# Altium PCB Audio_testboard.PcbDoc (part 2 of 6)
Units mm, origin at the board's own origin, x right, y up, seen from the top; angles counter-clockwise.
Board outline 220.73 x 144.32 mm, 4 copper layers (Top Layer, Mid-Layer 1, Mid-Layer 2, Bottom Layer), stack 1.894 mm thick; 462 components, 310 nets, 1757 pads, 740 vias.
Unrouted connection lines stored in the file: 5.
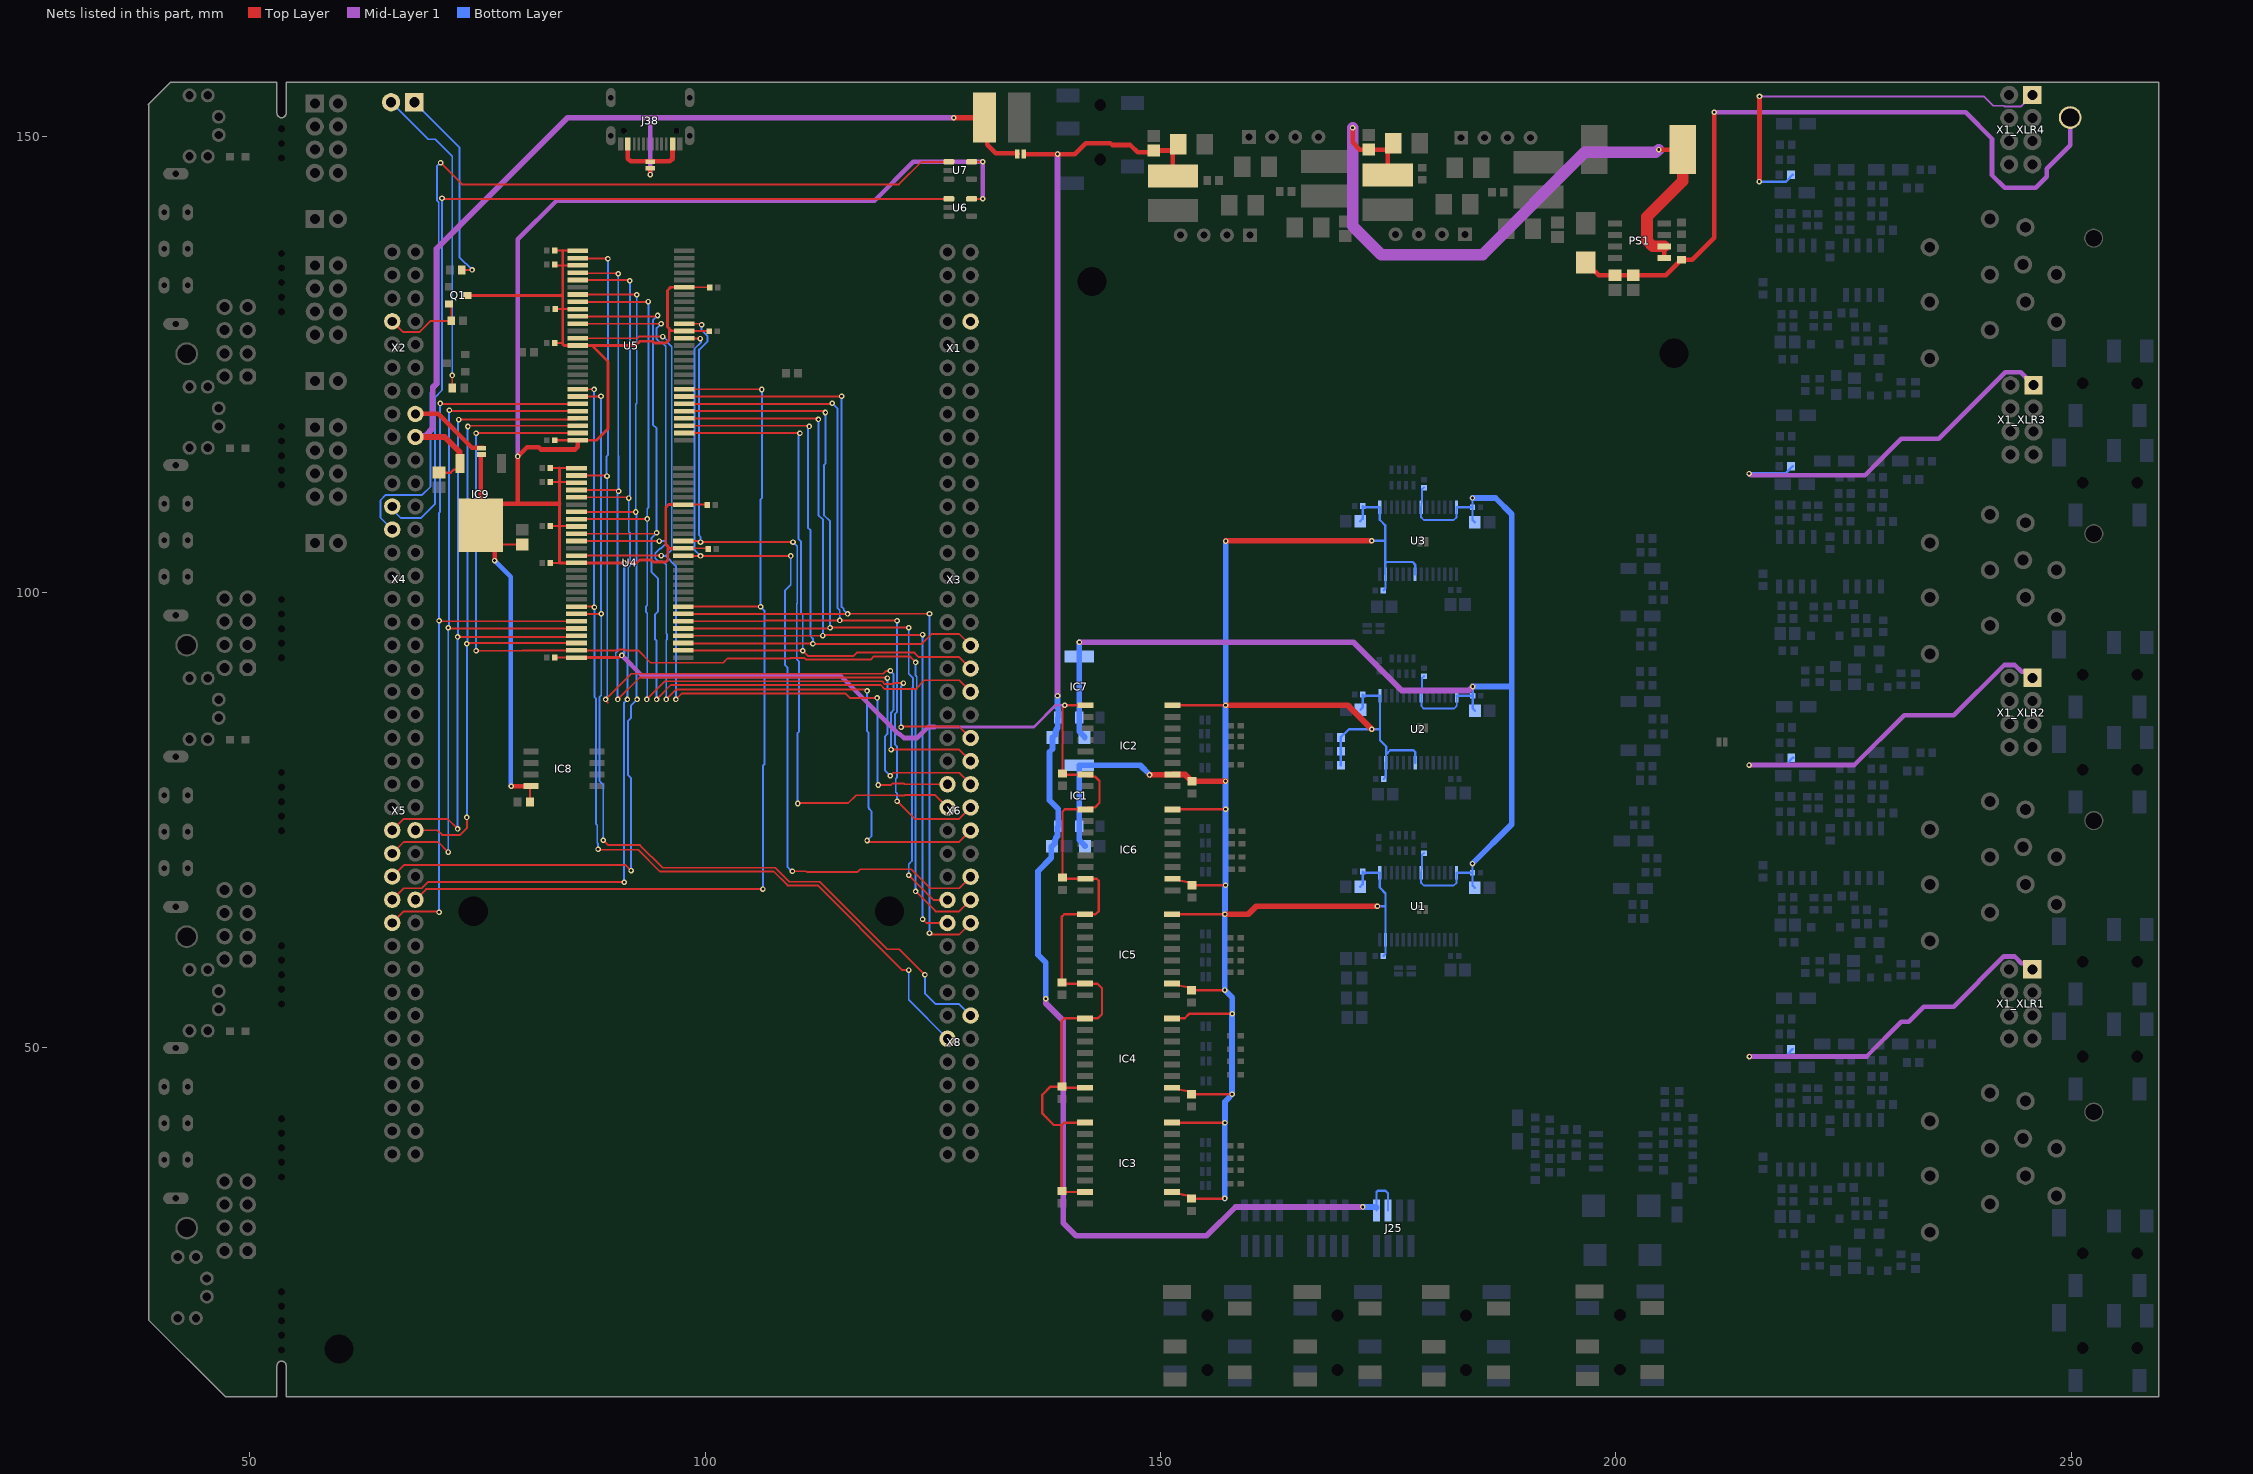
[diagram p4: the nets of this part, all layers, seen from the top]

## Footprints (in the part's own frame and the unit in brackets; to place one, negate y for a bottom-side part, rotate by r counter-clockwise, add the part's x,y. Pads: shape width x height; smd on the part's side, far side on the other; paste and mask are expansions set on the pad) (continued)
TSOP-54 [mil]
  rect 20x90 smd: 1(-409.45,-230.31) 2(-377.95,-230.31) 3(-346.46,-230.31) 4(-314.96,-230.31) 5(-283.46,-230.31) 6(-251.97,-230.31) 7(-220.47,-230.31) 8(-188.98,-230.31) 9(-157.48,-230.31) 10(-125.98,-230.31) 11(-94.49,-230.31) 12(-62.99,-230.31) 13(-31.5,-230.31) 14(0,-230.31) 15(31.5,-230.31) 16(62.99,-230.31) 17(94.49,-230.31) 18(125.98,-230.31) 19(157.48,-230.31) 20(188.98,-230.31) 21(220.47,-230.31) 22(251.97,-230.31) 23(283.46,-230.31) 24(314.96,-230.31) 25(346.46,-230.31) 26(377.95,-230.31) 27(409.45,-230.31) 28(409.45,230.32) 29(377.95,230.32) 30(346.46,230.32) 31(314.96,230.32) 32(283.46,230.32) 33(251.97,230.32) 34(220.47,230.32) 35(188.98,230.32) 36(157.48,230.32) 37(125.98,230.32) 38(94.49,230.32) 39(62.99,230.32) 40(31.5,230.32) 41(0,230.32) 42(-31.5,230.32) 43(-62.99,230.32) 44(-94.49,230.32) 45(-125.98,230.32) 46(-157.48,230.32) 47(-188.98,230.32) 48(-220.47,230.32) 49(-251.97,230.32) 50(-283.46,230.32) 51(-314.96,230.32) 52(-346.46,230.32) 53(-377.95,230.32) 54(-409.45,230.32)
  silkscreen extent -433,-197 433,197, body extent -443,-230 443,226, height 55
TSSOP-28 [mil]
  rect 58x14 smd mask+2.36: 1(-145,166) 2(-145,141) 3(-145,115) 4(-145,90) 5(-145,64) 6(-145,38) 7(-145,13) 8(-145,-13) 9(-145,-38) 10(-145,-64) 11(-145,-90) 12(-145,-115) 13(-145,-141) 14(-145,-166) 15(145,-166) 16(145,-141) 17(145,-115) 18(145,-90) 19(145,-64) 20(145,-38) 21(145,-13) 22(145,13) 23(145,38) 24(145,64) 25(145,90) 26(145,115) 27(145,141) 28(145,166)
  silkscreen extent -89,-193 89,193, body extent -127,-177 127,177, height 44
"YAGEO RES 0603_1608" [mm] "Chip Resistor, 2-Leads, Body 1.60x0.80mm"
  rect 0.9x0.8 smd: 1(-0.85,0) 2(0.85,0)
  silkscreen extent -1.5,-0.6 1.5,0.6, body extent -0.8,-0.4 0.8,0.4, height 0.45

## Part data
C1 C4 C6 C7 C9 C25 C28 C30 C41 C42 C51: library part LMK212ABJ106KD-T, "CAP CER 10UF 10V X5R 0805", Device Package="0805 (2012 Metric)", Manufacturer="Taiyo Yuden", Operating Temperature="-55°C ~ 85°C", Supplier Part Number 1=587-4282-1-ND, Temperature Coefficient=X5R, Tolerance=±10%, Voltage - Rated=10V, Applications="SMPS Filtering", Capacitance="10 µF", ComponentLink1Description=Datasheet, ComponentLink1URL=https://www.yuden.co.jp/productdata/catalog/mlcc01_e.pdf, ComponentLink2Description="DigiKey Link", ComponentLink2URL=https://www.digikey.com/en/products/detail/taiyo-yuden/LMK212ABJ106KD-T/4970805, LastUpdated="4/6/2026 7:33:15 PM", Lifecycle Status=Active, Minimum Order=1, Mounting Type="Surface Mount, MLCC", Package / Case="0805 (2012 Metric)", Packaging=TapeAndReel, Part Number=LMK212ABJ106KD-T, Part Status=Active, PartId=3697, Price=0.02, Series=M, Size / Dimension="0.079\" L x 0.049\" W (2.00mm x 1.25mm)", Supplier 1=DigiKey, Thickness (Max)="0.037\" (0.95mm)"
C1_XLR1 C1_XLR2 C1_XLR3 C1_XLR4 C7_XLR1 C7_XLR2 C7_XLR3 C7_XLR4 C12_XLR1 C12_XLR2 C12_XLR3 C12_XLR4 C14_XLR1 C14_XLR2 C14_XLR3 C14_XLR4 C82 C86: library part T491A106K010AT, "CAP TANT 10UF 10% 10V 1206", Device Package="1206 (3216 Metric)", ESR (Equivalent Series Resistance)=3.8Ohm, Lifetime @ Temp.="2000 Hrs @ 125°C", Manufacturer=KEMET, Manufacturer Size Code=A, Operating Temperature="-55°C ~ 125°C", Supplier Part Number 1=399-3684-1-ND, Tolerance=±10%, Voltage - Rated="10 V", Capacitance="10 µF", ComponentLink1Description=Datasheet, ComponentLink1URL=https://api.kemet.com/component-edge/download/datasheet/T491A106K010AT.pdf, ComponentLink2Description="DigiKey Link", ComponentLink2URL=https://www.digikey.com/en/products/detail/kemet/T491A106K010AT/818545, Features="General Purpose", Height - Seated (Max)="0.071\" (1.80mm)", LastUpdated="4/5/2026 8:12:52 PM", Lifecycle Status=Active, Minimum Order=1, Mounting Type="Surface Mount", Package / Case="1206 (3216 Metric)", Packaging=TapeAndReel, Part Number=T491A106K010AT, Part Status=Active, PartId=330, Price=0.09, Series=T491, Size / Dimension="0.126\" L x 0.063\" W (3.20mm x 1.60mm)", Supplier 1=DigiKey, Type=Molded
C2 C23: library part EMK212B7105KGHTR, "CAP CER 1UF 16V X7R 0805", Device Package="0805 (2012 Metric)", Manufacturer="Taiyo Yuden", Operating Temperature="-55°C ~ 125°C", Ratings=AEC-Q200, Supplier Part Number 1=587-6310-1-ND, Temperature Coefficient=X7R, Tolerance=±10%, Voltage - Rated=16V, Applications=Automotive, Capacitance="1 µF", ComponentLink1Description=Datasheet, ComponentLink1URL="https://ds.yuden.co.jp/TYCOMPAS/ut/detail?pn=EMK212B7105KGHTR &u=M", ComponentLink2Description="DigiKey Link", ComponentLink2URL=https://www.digikey.com/en/products/detail/taiyo-yuden/EMK212B7105KGHTR/6563155, LastUpdated="4/6/2026 7:33:15 PM", Lifecycle Status=Active, Minimum Order=1, Mounting Type="Surface Mount, MLCC", Package / Case="0805 (2012 Metric)", Packaging=TapeAndReel, Part Number=EMK212B7105KGHTR, Part Status=Active, PartId=3641, Price=0.02, Series=M, Size / Dimension="0.079\" L x 0.049\" W (2.00mm x 1.25mm)", Supplier 1=DigiKey, Thickness (Max)="0.053\" (1.35mm)"
C2_XLR1 C2_XLR2 C2_XLR3 C2_XLR4 C84 C88: library part GRM1885C1H103JA01D, "CAP CER 10000PF 50V C0G/NP0 0603", Device Package="0603 (1608 Metric)", Manufacturer="Murata Electronics", Operating Temperature="-55°C ~ 125°C", Supplier Part Number 1=490-9666-1-ND, Temperature Coefficient="C0G, NP0", Tolerance=±5%, Voltage - Rated=50V, Applications="General Purpose", Capacitance="10000 pF", ComponentLink1Description=Datasheet, ComponentLink1URL=https://www.murata.com/~/media/webrenewal/support/library/catalog/products/capacitor/mlcc/c02e.ashx?la=en-us, ComponentLink2Description="DigiKey Link", ComponentLink2URL=https://www.digikey.com/en/products/detail/murata-electronics/GRM1885C1H103JA01D/4421555, LastUpdated="4/6/2026 7:23:21 PM", Lifecycle Status=Active, Minimum Order=1, Mounting Type="Surface Mount, MLCC", Package / Case="0603 (1608 Metric)", Packaging=TapeAndReel, Part Number=GRM1885C1H103JA01D, Part Status=Active, PartId=11077, Price=0.02, Series=GRM, Size / Dimension="0.063\" L x 0.031\" W (1.60mm x 0.80mm)", Supplier 1=DigiKey, Thickness (Max)="0.035\" (0.90mm)"
C3 C5 C8 C10 C11 C12 C15 C16 C27 C29 C40 C43 C44 C46 C50: library part CL05B104JO5NNNC, "CAP CER 0.1UF 16V X7R 0402", Device Package="0402 (1005 Metric)", Manufacturer="Samsung Electro-Mechanics", Operating Temperature="-55°C ~ 125°C", Supplier Part Number 1=1276-1505-1-ND, Temperature Coefficient=X7R, Tolerance=±5%, Voltage - Rated=16V, Applications="General Purpose", Capacitance="0.1 µF", ComponentLink1Description=Datasheet, ComponentLink1URL=http://www.samsungsem.com/kr/support/product-search/mlcc/CL05B104JO5NNNC.jsp, ComponentLink2Description="DigiKey Link", ComponentLink2URL=https://www.digikey.com/en/products/detail/samsung-electro-mechanics/CL05B104JO5NNNC/3887163, LastUpdated="4/6/2026 7:11:05 PM", Lifecycle Status=Active, Minimum Order=1, Mounting Type="Surface Mount, MLCC", Package / Case="0402 (1005 Metric)", Packaging=TapeAndReel, Part Number=CL05B104JO5NNNC, Part Status=Active, PartId=2761, Price=0.01, Series=CL, Size / Dimension="0.039\" L x 0.020\" W (1.00mm x 0.50mm)", Supplier 1=DigiKey, Thickness (Max)="0.022\" (0.55mm)"
C3_XLR1 C3_XLR2 C3_XLR3 C3_XLR4 C4_XLR1 C4_XLR2 C4_XLR3 C4_XLR4 C5_XLR1 C5_XLR2 C5_XLR3 C5_XLR4 C6_XLR1 C6_XLR2 C6_XLR3 C6_XLR4 C81 C85: library part CC0603GRNPO9BN220, "CAP CER 22PF 50V C0G/NPO 0603", Device Package="0603 (1608 Metric)", Manufacturer=Yageo, Operating Temperature="-55°C ~ 125°C", Supplier Part Number 1=311-3925-1-ND, Temperature Coefficient="C0G, NP0", Tolerance=±2%, Voltage - Rated=50V, Applications="General Purpose", Capacitance="22 pF", ComponentLink1Description=Datasheet, ComponentLink1URL=https://www.yageo.com/upload/media/product/productsearch/datasheet/mlcc/UPY-GP_NP0_16V-to-50V_17.pdf, ComponentLink2Description="DigiKey Link", ComponentLink2URL=https://www.digikey.com/en/products/detail/yageo/CC0603GRNPO9BN220/5883550, LastUpdated="4/6/2026 7:23:47 PM", Lifecycle Status=Active, Minimum Order=1, Mounting Type="Surface Mount, MLCC", Package / Case="0603 (1608 Metric)", Packaging=TapeAndReel, Part Number=CC0603GRNPO9BN220, Part Status=Active, PartId=3677, Price=0.01, Series=CC, Size / Dimension="0.063\" L x 0.031\" W (1.60mm x 0.80mm)", Supplier 1=DigiKey, Thickness (Max)="0.035\" (0.90mm)"
C8_XLR1 C8_XLR2 C8_XLR3 C8_XLR4 C9_XLR1 C9_XLR2 C9_XLR3 C9_XLR4 C10_XLR1 C10_XLR2 C10_XLR3 C10_XLR4 C11_XLR1 C11_XLR2 C11_XLR3 C11_XLR4 C69 C89 C90: library part C0603C104K5RAC7411, "CAP CER 0.1UF 50V X7R 0603", Device Package="0603 (1608 Metric)", Manufacturer=KEMET, Operating Temperature="-55°C ~ 125°C", Supplier Part Number 1=399-C0603C104K5RAC7411CT-ND, Temperature Coefficient=X7R, Tolerance=±10%, Voltage - Rated=50V, Applications="Bypass, Decoupling", Capacitance="0.1 µF", ComponentLink1Description=Datasheet, ComponentLink1URL=https://api.kemet.com/component-edge/download/datasheet/C0603C104K5RAC7411.pdf, ComponentLink2Description="DigiKey Link", ComponentLink2URL=https://www.digikey.com/en/products/detail/kemet/C0603C104K5RAC7411/3317013, LastUpdated="4/6/2026 7:23:52 PM", Lifecycle Status=Active, Minimum Order=1, Mounting Type="Surface Mount, MLCC", Package / Case="0603 (1608 Metric)", Packaging=TapeAndReel, Part Number=C0603C104K5RAC7411, Part Status=Active, PartId=2233, Price=0.01, Series="SMD Comm X7R", Size / Dimension="0.063\" L x 0.031\" W (1.60mm x 0.80mm)", Supplier 1=DigiKey, Thickness (Max)="0.035\" (0.90mm)"
C13 C14 C19 C20 C45 C48: library part TR3A106K010C2000, "CAP TANT 10UF 10% 10V 1206", Device Package="1206 (3216 Metric)", ESR (Equivalent Series Resistance)=2Ohm, Manufacturer="Vishay Sprague", Manufacturer Size Code=A, Operating Temperature="-55°C ~ 125°C", Supplier Part Number 1=718-1300-1-ND, Tolerance=±10%, Voltage - Rated="10 V", Capacitance="10 µF", ComponentLink1Description=Datasheet, ComponentLink1URL=http://www.vishay.com/docs/40080/tr3.pdf, ComponentLink2Description="DigiKey Link", ComponentLink2URL=https://www.digikey.com/en/products/detail/vishay-sprague/TR3A106K010C2000/1579435, Features="General Purpose", Height - Seated (Max)="0.071\" (1.80mm)", LastUpdated="4/5/2026 8:12:52 PM", Lifecycle Status=Active, Minimum Order=1, Mounting Type="Surface Mount", Package / Case="1206 (3216 Metric)", Packaging=TapeAndReel, Part Number=TR3A106K010C2000, Part Status=Active, PartId=299, Price=0.24, Series="TANTAMOUNT™, TR3", Size / Dimension="0.126\" L x 0.063\" W (3.20mm x 1.60mm)", Supplier 1=DigiKey, Type=Molded
C13_XLR1 C13_XLR2 C13_XLR3 C13_XLR4 C71 C93 C96_XLR1 C96_XLR2 C96_XLR3 C96_XLR4: library part C0805C105K4RAC7800, "CAP CER 1UF 16V X7R 0805", Device Package="0805 (2012 Metric)", Manufacturer=KEMET, Operating Temperature="-55°C ~ 125°C", Supplier Part Number 1=399-C0805C105K4RAC7800CT-ND, Temperature Coefficient=X7R, Tolerance=±10%, Voltage - Rated=16V, Applications="Bypass, Decoupling", Capacitance="1 µF", ComponentLink1Description=Datasheet, ComponentLink1URL=https://api.kemet.com/component-edge/download/datasheet/C0805C105K4RACTU.pdf, ComponentLink2Description="DigiKey Link", ComponentLink2URL=https://www.digikey.com/en/products/detail/kemet/C0805C105K4RAC7800/416047, LastUpdated="4/6/2026 7:31:58 PM", Lifecycle Status=Active, Minimum Order=1, Mounting Type="Surface Mount, MLCC", Package / Case="0805 (2012 Metric)", Packaging=TapeAndReel, Part Number=C0805C105K4RAC7800, Part Status=Active, PartId=32075, Price=0.01, Series="SMD Comm X7R", Size / Dimension="0.079\" L x 0.049\" W (2.00mm x 1.25mm)", Supplier 1=DigiKey, Thickness (Max)="0.039\" (1.00mm)"
C17 C18 C21 C22 C47 C49: library part CC0603JRX7R9BB221, "CAP CER 220PF 50V X7R 0603", Device Package="0603 (1608 Metric)", Manufacturer=Yageo, Operating Temperature="-55°C ~ 125°C", Supplier Part Number 1=311-4009-1-ND, Temperature Coefficient=X7R, Tolerance=±5%, Voltage - Rated=50V, Applications="General Purpose", Capacitance="220 pF", ComponentLink1Description=Datasheet, ComponentLink1URL=https://www.yageo.com/upload/media/product/productsearch/datasheet/mlcc/UPY-GPHC_X7R_6.3V-to-50V_18.pdf, ComponentLink2Description="DigiKey Link", ComponentLink2URL=https://www.digikey.com/en/products/detail/yageo/CC0603JRX7R9BB221/5883681, LastUpdated="4/6/2026 7:23:48 PM", Lifecycle Status=Active, Minimum Order=1, Mounting Type="Surface Mount, MLCC", Package / Case="0603 (1608 Metric)", Packaging=TapeAndReel, Part Number=CC0603JRX7R9BB221, Part Status=Active, PartId=3536, Price=0.01, Series=CC, Size / Dimension="0.063\" L x 0.031\" W (1.60mm x 0.80mm)", Supplier 1=DigiKey, Thickness (Max)="0.035\" (0.90mm)"
C24 C26 C34 C35 C36 C37 C38 C39 C53 C54: library part 06035C104MAT2A, "CAP CER 0.1UF 50V X7R 0603", Device Package="0603 (1608 Metric)", Manufacturer="AVX Corporation", Operating Temperature="-55°C ~ 125°C", Supplier Part Number 1=478-7928-1-ND, Temperature Coefficient=X7R, Tolerance=±20%, Voltage - Rated=50V, Applications="General Purpose", Capacitance=0.1µF, ComponentLink1Description=Datasheet, ComponentLink1URL=http://datasheets.avx.com/X7RDielectric.pdf, ComponentLink2Description="DigiKey Link", ComponentLink2URL=http://digikey.com/product-detail/en/avx-corporation/06035C104MAT2A/478-7928-1-ND/3881551, LastUpdated="9/2/2020 1:03:35 AM", Lifecycle Status=Active, Minimum Order=1, Mounting Type="Surface Mount, MLCC", Package / Case="0603 (1608 Metric)", Packaging=TapeAndReel, Part Number=06035C104MAT2A, Part Status=Active, PartId=2734, Price=0.02, Series=-, Size / Dimension="0.063\" L x 0.032\" W (1.60mm x 0.81mm)", Supplier 1=DigiKey, Thickness (Max)="0.035\" (0.90mm)"
C31 C32 C33 C52: library part CBR08C909BAGAC, "CAP CER 9PF 250V C0G/NP0 0805", Device Package="0805 (2012 Metric)", Manufacturer=KEMET, Operating Temperature="-55°C ~ 125°C", Supplier Part Number 1=399-8712-1-ND, Temperature Coefficient="C0G, NP0", Tolerance=±0.1pF, Voltage - Rated=250V, Applications="RF, Microwave, High Frequency", Capacitance="9 pF", ComponentLink1Description=Datasheet, ComponentLink1URL=https://api.kemet.com/component-edge/download/datasheet/CBR08C909BAGAC.pdf, ComponentLink2Description="DigiKey Link", ComponentLink2URL=https://www.digikey.com/en/products/detail/kemet/CBR08C909BAGAC/3480238, Features="High Q, Low Loss, Ultra Low ESR", LastUpdated="4/6/2026 7:32:40 PM", Lifecycle Status=Active, Minimum Order=1, Mounting Type="Surface Mount, MLCC", Package / Case="0805 (2012 Metric)", Packaging=TapeAndReel, Part Number=CBR08C909BAGAC, Part Status=Active, PartId=13883, Price=0.41, Series="CBR-SMD RF C0G", Size / Dimension="0.079\" L x 0.049\" W (2.00mm x 1.25mm)", Supplier 1=DigiKey, Thickness (Max)="0.037\" (0.95mm)"
C55 C56 C57 C58 C59 C60 C61 C62 C63 C64 C65 C66 C67 C68: library part C0402C104K4RACAUTO, "CAP CER 0.1UF 16V X7R 0402", Device Package="0402 (1005 Metric)", Manufacturer=KEMET, Operating Temperature="-55°C ~ 125°C", Ratings=AEC-Q200, Supplier Part Number 1=399-6828-1-ND, Temperature Coefficient=X7R, Tolerance=±10%, Voltage - Rated=16V, Applications="Automotive, Bypass, Decoupling", Capacitance="0.1 µF", ComponentLink1Description=Datasheet, ComponentLink1URL=https://api.kemet.com/component-edge/download/specsheet/C0402C104K4RACAUTO.pdf, ComponentLink2Description="DigiKey Link", ComponentLink2URL=https://www.digikey.com/en/products/detail/kemet/C0402C104K4RACAUTO/3314827, LastUpdated="4/6/2026 7:11:04 PM", Lifecycle Status=Active, Minimum Order=1, Mounting Type="Surface Mount, MLCC", Package / Case="0402 (1005 Metric)", Packaging=TapeAndReel, Part Number=C0402C104K4RACAUTO, Part Status=Active, PartId=3024, Price=0.01, Series="SMD Auto X7R", Size / Dimension="0.039\" L x 0.020\" W (1.00mm x 0.50mm)", Supplier 1=DigiKey, Thickness (Max)="0.022\" (0.55mm)"
C70 C73 C76 C79 C92: library part C0805C106K8PAC7800, "CAP CER 10UF 10V X5R 0805", Device Package="0805 (2012 Metric)", Manufacturer=KEMET, Operating Temperature="-55°C ~ 85°C", Supplier Part Number 1=399-C0805C106K8PAC7800CT-ND, Temperature Coefficient=X5R, Tolerance=±10%, Voltage - Rated=10V, Applications="Bypass, Decoupling", Capacitance="10 µF", ComponentLink1Description=Datasheet, ComponentLink1URL=https://connect.kemet.com:7667/gateway/IntelliData-ComponentDocumentation/1.0/download/datasheet/C0805C106K8PACTU, ComponentLink2Description="DigiKey Link", ComponentLink2URL=https://www.digikey.com/en/products/detail/kemet/C0805C106K8PAC7800/1090830, LastUpdated="4/6/2026 7:31:47 PM", Lifecycle Status=Active, Minimum Order=1, Mounting Type="Surface Mount, MLCC", Package / Case="0805 (2012 Metric)", Packaging=TapeAndReel, Part Number=C0805C106K8PAC7800, Part Status=Active, PartId=44790, Price=0.01, Series="SMD Comm X5R", Size / Dimension="0.079\" L x 0.049\" W (2.00mm x 1.25mm)", Supplier 1=DigiKey, Thickness (Max)="0.055\" (1.40mm)"
C72 C74 C75 C77 C78 C80 C91 C95: library part TCJB475M025R0150, "CAP TANT POLY 4.7UF 25V 1210", ESR (Equivalent Series Resistance)="100mOhm @ 100kHz", Lifetime @ Temp.="2000 Hrs @ 105°C", Manufacturer="AVX Corporation", Manufacturer Size Code=B, Operating Temperature="-55°C ~ 105°C", Package / Case="1411 (3528 Metric), 1210", Supplier Part Number 1=478-6630-1-ND, Tolerance=±20%, Voltage - Rated=25V, Capacitance=4.7µF, ComponentLink1Description=Datasheet, ComponentLink1URL=http://datasheets.avx.com/TCJ.pdf, ComponentLink2Description="DigiKey Link", ComponentLink2URL=http://digikey.com/product-detail/en/avx-corporation/TCJB475M025R0150/478-6630-1-ND/2676432, Features="General Purpose", Height - Seated (Max)="0.083\" (2.10mm)", LastUpdated="9/2/2020 1:16:39 AM", Lifecycle Status=Active, Minimum Order=1, Mounting Type="Surface Mount", Packaging=TapeAndReel, Part Number=TCJB475M025R0150, Part Status=Active, PartId=1578, Price=0.29, Series=TCJ, Size / Dimension="0.138\" L x 0.110\" W (3.50mm x 2.80mm)", Supplier 1=DigiKey, Type=Molded
C83 C87: library part 293D476X9010D2TE3, "CAP TANT 47UF 10% 10V 2917", Device Package="2917 (7343 Metric)", ESR (Equivalent Series Resistance)=700mOhm, Manufacturer="Vishay Sprague", Manufacturer Size Code=D, Operating Temperature="-55°C ~ 125°C", Supplier Part Number 1=718-1088-1-ND, Tolerance=±10%, Voltage - Rated="10 V", Capacitance="47 µF", ComponentLink1Description=Datasheet, ComponentLink1URL=http://www.vishay.com/docs/40002/293d.pdf, ComponentLink2Description="DigiKey Link", ComponentLink2URL=https://www.digikey.com/en/products/detail/vishay-sprague/293D476X9010D2TE3/1559440, Features="General Purpose", Height - Seated (Max)="0.122\" (3.10mm)", LastUpdated="4/5/2026 8:13:50 PM", Lifecycle Status=Active, Minimum Order=1, Mounting Type="Surface Mount", Package / Case="2917 (7343 Metric)", Packaging=TapeAndReel, Part Number=293D476X9010D2TE3, Part Status=Active, PartId=2778, Price=0.19, Series="TANTAMOUNT™, 293D", Size / Dimension="0.287\" L x 0.169\" W (7.30mm x 4.30mm)", Supplier 1=DigiKey, Type=Molded
C94: library part CC0805MKX5R8BB226, "CAP CER 22UF 25V X5R 0805", Device Package="0805 (2012 Metric)", Manufacturer=Yageo, Operating Temperature="-55°C ~ 85°C", Supplier Part Number 1=311-1903-1-ND, Temperature Coefficient=X5R, Tolerance=±20%, Voltage - Rated=25V, Applications="General Purpose", Capacitance="22 µF", ComponentLink1Description=Datasheet, ComponentLink1URL=https://www.yageo.com/upload/media/product/productsearch/datasheet/mlcc/UPY-GPHC_X5R_4V-to-50V_25.pdf, ComponentLink2Description="DigiKey Link", ComponentLink2URL=https://www.digikey.com/en/products/detail/yageo/CC0805MKX5R8BB226/5195309, LastUpdated="4/6/2026 7:32:08 PM", Lifecycle Status=Active, Minimum Order=1, Mounting Type="Surface Mount, MLCC", Package / Case="0805 (2012 Metric)", Packaging=TapeAndReel, Part Number=CC0805MKX5R8BB226, Part Status=Active, PartId=39226, Price=0.09, Series=CC, Size / Dimension="0.079\" L x 0.049\" W (2.00mm x 1.25mm)", Supplier 1=DigiKey, Thickness (Max)="0.057\" (1.45mm)"
D1_XLR1 D1_XLR2 D1_XLR3 D1_XLR4: "DIODE GEN PURP 100V 150MA SOD123", Capacitance @ Vr, F="2pF @ 0V, 1MHz", Current - Average Rectified (Io)=150mA, Current - Reverse Leakage @ Vr="1 µA @ 75 V", Manufacturer="Micro Commercial Co", Operating Temperature - Junction="-65°C ~ 150°C", Package / Case=SOD-123, Supplier Part Number 1=1N4148WTPMSCT-ND, Voltage - DC Reverse (Vr) (Max)="100 V", Voltage - Forward (Vf) (Max) @ If="1.25 V @ 150 mA", ComponentLink1Description=Datasheet, ComponentLink1URL=https://www.mccsemi.com/pdf/Products/1N4148W(SOD123).pdf, ComponentLink2Description="DigiKey Link", ComponentLink2URL=https://www.digikey.com/en/products/detail/micro-commercial-co/1N4148W-TP/717196, Diode Type=Standard, LastUpdated="4/5/2026 8:31:46 PM", Lifecycle Status=Active, Minimum Order=1, Mounting Type="Surface Mount", Packaging=TapeAndReel, Part Number=1N4148W-TP, Part Status=Active, PartId=999, Price=0.01, Reverse Recovery Time (trr)="4 ns", Series=-, Speed="Small Signal =< 200mA (Io), Any Speed", Supplier 1=DigiKey, Supplier Device Package=SOD-123
D2_XLR1 D2_XLR2 D2_XLR3 D2_XLR4: library part LSM0805412V, "LED RED CLEAR 0805 SMD", Current - Test=20mA, Device Package="0805 (2012 Metric)", Lens Color=Colorless, Manufacturer="Visual Communications Company - VCC", Millicandela Rating=100mcd, Supplier Device Package=0805, Supplier Part Number 1=28-LSM0805412VCT-ND, Voltage - Forward (Vf) (Typ)=2V, Color=Red, ComponentLink1Description=Datasheet, ComponentLink1URL=https://www.vcclite.com/wp-content/uploads/wpallimport/files/files/LSM0805452V-Green-Datasheet.pdf, ComponentLink2Description="DigiKey Link", ComponentLink2URL=https://www.digikey.com/en/products/detail/visual-communications-company-vcc/LSM0805412V/10229616, Configuration=0805, Height (Max)=0.90mm, LastUpdated="4/5/2026 8:38:27 PM", Lens Size="1.40mm x 1.20mm", Lens Style="Rectangle with Flat Top", Lens Transparency=Clear, Lifecycle Status=Active, Minimum Order=1, Mounting Type="Surface Mount", Package / Case="0805 (2012 Metric)", Packaging=TapeAndReel, Part Number=LSM0805412V, Part Status=Active, PartId=336, Price=0.10, Series=LSM0805, Size / Dimension="2.00mm L x 1.25mm W", Supplier 1=DigiKey, Viewing Angle=120°, Wavelength - Dominant=625nm, Wavelength - Peak=625nm
D3: "DIODE SCHOTTKY 40V 2A DO214AA", Current - Average Rectified (Io)=2A, Current - Reverse Leakage @ Vr="400µA @ 40V", Manufacturer="ON Semiconductor", Operating Temperature - Junction="-65°C ~ 125°C", Package / Case="DO-214AA, SMB", Supplier Device Package="DO-214AA (SMB)", Supplier Part Number 1=SS24FSCT-ND, Voltage - DC Reverse (Vr) (Max)=40V, Voltage - Forward (Vf) (Max) @ If="500mV @ 2A", ComponentLink1Description=Datasheet, ComponentLink1URL=https://www.onsemi.com/pub/Collateral/SS29-D.pdf, ComponentLink2Description="DigiKey Link", ComponentLink2URL=http://digikey.com/product-detail/en/on-semiconductor/SS24/SS24FSCT-ND/1626273, Diode Type=Schottky, LastUpdated="4/5/2026 8:31:06 PM", Lifecycle Status=Active, Minimum Order=1, Mounting Type="Surface Mount", Packaging=TapeAndReel, Part Number=SS24, Part Status=Active, PartId=1394, Price=0.10, Series=-, Speed="Fast Recovery =< 500ns, > 200mA (Io)", Supplier 1=DigiKey
D4_XLR1 D4_XLR2 D4_XLR3 D4_XLR4: library part QTLP630C4TR, "LED GREEN CLEAR 0805 SMD", Current - Test=20mA, Device Package="0805 (2012 Metric)", Lens Color=Colorless, Manufacturer="Everlight Electronics Co Ltd", Millicandela Rating=10mcd, Supplier Device Package=0805, Supplier Part Number 1=1080-1411-1-ND, Voltage - Forward (Vf) (Typ)=2.1V, Color=Green, ComponentLink1Description=Datasheet, ComponentLink1URL=//media.digikey.com/PDF/Data%20Sheets/Everlight%20PDFs/QTLP630-2.pdf, ComponentLink2Description="DigiKey Link", ComponentLink2URL=https://www.digikey.com/en/products/detail/everlight-electronics-co-ltd/QTLP630C4TR/2675902, Configuration=Standard, Height (Max)=1.20mm, LastUpdated="4/5/2026 8:39:04 PM", Lens Size="1.40mm x 1.25mm", Lens Style="Rectangle with Flat Top", Lens Transparency=Clear, Lifecycle Status=Active, Minimum Order=1, Mounting Type="Surface Mount", Package / Case="0805 (2012 Metric)", Packaging=TapeAndReel, Part Number=QTLP630C4TR, Part Status=Active, PartId=240, Price=0.05, Series=-, Size / Dimension="2.00mm L x 1.25mm W", Supplier 1=DigiKey, Viewing Angle=140°, Wavelength - Dominant=570nm, Wavelength - Peak=565nm
IC1 IC7: "Integrated Circuit", Manufacturer_Name="Advanced Monolithic Systems", Datasheet Link=http://www.advanced-monolithic.com/pdf/ds1117.pdf, Height=1.8mm, Manufacturer_Part_Number=ams1117-3.3v, Supplier 1=LCSC
IC1_XLR1 IC1_XLR2 IC1_XLR3 IC1_XLR4 IC2_XLR1 IC2_XLR2 IC2_XLR3 IC2_XLR4 IC13: "Integrated Circuit", Manufacturer_Name="Texas Instruments", Mouser Part Number=595-NE5532DRE4, Arrow Part Number=NE5532DRE4, Arrow Price/Stock=https://www.arrow.com/en/products/ne5532dre4/texas-instruments, Datasheet Link=https://www.ti.com/lit/ds/symlink/ne5532.pdf?HQS=dis-mous-null-mousermode-dsf-pf-null-wwe&ts=1618482303902&ref_url=https%253A%252F%252Fwww.mouser.com%252F, Height=1.75mm, Manufacturer_Part_Number=NE5532DRE4, Mouser Price/Stock=https://www.mouser.co.uk/ProductDetail/Texas-Instruments/NE5532DRE4?qs=7nS3%252BbEUL6spPf9Rt7S6cg%3D%3D
IC2 IC3 IC4 IC5 IC6: "Integrated Circuit", Manufacturer_Name="Texas Instruments", Mouser Part Number=595-ISO7241CDWR, Arrow Part Number=ISO7241CDWR, Arrow Price/Stock=https://www.arrow.com/en/products/iso7241cdwr/texas-instruments?region=nac, Datasheet Link=http://www.ti.com/lit/gpn/iso7241c, Height=2.65mm, Manufacturer_Part_Number=ISO7241CDWR, Mouser Price/Stock=https://www.mouser.co.uk/ProductDetail/Texas-Instruments/ISO7241CDWR?qs=LDGDZb5k%2F%252B%2FseN2cNP%252BcHQ%3D%3D
IC8: "Integrated Circuit", Manufacturer_Name=Micron, Mouser Part Number=340-182267, Arrow Part Number=N25Q128A13ESE40F, Arrow Price/Stock=https://www.arrow.com/en/products/n25q128a13ese40f/micron-technology, Datasheet Link=https://datasheet.datasheetarchive.com/originals/distributors/Datasheets-DGA23/1494983.pdf, Height=2.16mm, Manufacturer_Part_Number=N25Q128A13ESE40F, Mouser Price/Stock=https://www.mouser.co.uk/ProductDetail/Micron/N25Q128A13ESE40F?qs=taEdVNyAfdHw8xv9Y4zfpQ%3D%3D
IC9: "Integrated Circuit", Manufacturer_Name=STMicroelectronics, Mouser Part Number=511-LD1117DT33-TR, Arrow Part Number=LD1117DT33TR, Arrow Price/Stock=https://www.arrow.com/en/products/ld1117dt33tr/stmicroelectronics?region=nac, Datasheet Link=http://www.st.com/web/en/resource/technical/document/datasheet/CD00000544.pdf, Height=2.4mm, Manufacturer_Part_Number=LD1117DT33TR, Mouser Price/Stock=https://www.mouser.co.uk/ProductDetail/STMicroelectronics/LD1117DT33TR?qs=4JhUBQGAOSd4P5jVYGxp2g%3D%3D
IC10 IC11 IC12 IC14: "Mournsun / JGCRYT DC-DC isolated converter module 5v -> 5v 1W"
J1_XLR1 J1_XLR2 J1_XLR3 J1_XLR4 J2_XLR1 J2_XLR2 J2_XLR3 J2_XLR4 J3 J29 J30 J31 J32 J39 J40 J41 J45: library part "3.5mm jack stereo smd", "Conn 3.5MM Stereo Jack F 3 POS Solder RA SMD 3 Terminal 1 Port T/R PJ-327", Package=None, Availability=Good, MF=Switchcraft, MP=35RASMT2BHNTRX, Price="0.84 USD", SnapEDA_Link=https://www.snapeda.com/parts/35RASMT2BHNTRX/Switchcraft%20Inc./view-part/?ref=snap
J4 J5 J6 J7 J8 J9 J10 J11 J12 J13 J14 J15 J16 J17 J18 J19 J20 J21 J22 J23 J33 J34 J35 J36 J37 J42 J44: library part Jumper_single, CommentText="\"Перемычка\""
J24 J28: library part Jumper_double, CommentText="\"Перемычка\""
J25 J26 J27: "Connector", Manufacturer_Name="Amphenol Communications Solutions", Datasheet Link=https://cdn.amphenol-cs.com/media/wysiwyg/files/drawing/20021121.pdf, Height=4.55mm, Manufacturer_Part_Number=20021121-00008T4LF, System=Connector
J38: "USB Connectors 24 Receptacle 1 8.94*7.3mm RoHS", Package=None, Availability=Unavailable, MF="{'manufacturer': u'HRO Electronics Co., Ltd.'}", MP=TYPE-C-31-M-12, Price=None
J43_XLR1 J43_XLR2 J43_XLR3 J43_XLR4: "XLR Neutrik NCJ6FA-H"
L1: library part SRR1280-330M, "FIXED IND 33UH 3.5A 57 MOHM SMD", Current - Saturation=3.3A, Current Rating (Amps)="3.5 A", DC Resistance (DCR)="57mOhm Max", Device Package=Nonstandard, Frequency - Self Resonant=9.5MHz, Inductance Frequency - Test="100 kHz", Manufacturer="Bourns Inc.", Operating Temperature="-40°C ~ 125°C", Q @ Freq="28 @ 2.52MHz", Supplier Part Number 1=SRR1280-330MCT-ND, Tolerance=±20%, ComponentLink1Description=Datasheet, ComponentLink1URL=https://www.bourns.com/docs/Product-Datasheets/SRR1280.pdf, ComponentLink2Description="DigiKey Link", ComponentLink2URL=https://www.digikey.com/en/products/detail/bourns-inc/SRR1280-330M/1969998, Height - Seated (Max)="0.315\" (8.00mm)", Inductance="33 µH", LastUpdated="4/5/2026 8:41:43 PM", Lifecycle Status=Active, Material - Core=Ferrite, Minimum Order=1, Mounting Type="Surface Mount", Package / Case=Nonstandard, Packaging=TapeAndReel, Part Number=SRR1280-330M, Part Status=Active, PartId=25, Price=0.53, Series=SRR1280, Shielding=Shielded, Size / Dimension="0.492\" L x 0.492\" W (12.50mm x 12.50mm)", Supplier 1=DigiKey, Type="Drum Core, Wirewound"
L2 L3 L4 L5 L6: library part Inductor_CD54, "Aliexpress CD54 type inductor"
PS1: "Power Supply", Manufacturer_Name=XLSEMI, Datasheet Link=http://www.ksmcu.com/pdf/XL6007%20datasheet.pdf, Height=1.75mm, Manufacturer_Part_Number=XL6007E1
Q1 Q2 Q3_XLR1 Q3_XLR2 Q3_XLR3 Q3_XLR4: "TRANS NPN 40V 0.2A SOT-23-3", Current - Collector (Ic) (Max)="200 mA", Current - Collector Cutoff (Max)="50nA (ICBO)", DC Current Gain (hFE) (Min) @ Ic, Vce="100 @ 10mA, 1V", Frequency - Transition=300MHz, Manufacturer="Diodes Incorporated", Operating Temperature="-55°C ~ 150°C (TJ)", Package / Case="TO-236-3, SC-59, SOT-23-3", Power - Max="300 mW", Supplier Device Package=SOT-23-3, Supplier Part Number 1=MMBT3904-FDICT-ND, Voltage - Collector Emitter Breakdown (Max)="40 V", ComponentLink1Description=Datasheet, ComponentLink1URL=https://www.diodes.com/assets/Datasheets/ds30036.pdf, ComponentLink2Description="DigiKey Link", ComponentLink2URL=https://www.digikey.com/en/products/detail/diodes-incorporated/MMBT3904-7-F/814494, LastUpdated="4/5/2026 9:03:01 PM", Lifecycle Status=Active, Minimum Order=1, Mounting Type="Surface Mount", Packaging=TapeAndReel, Part Number=MMBT3904-7-F, Part Status=Active, PartId=85, Price=0.01, Series=-, Supplier 1=DigiKey, Transistor Type=NPN, Vce Saturation (Max) @ Ib, Ic="300mV @ 5mA, 50mA"
R1 R2 R3 R4 R5 R6 R7 R8 R17 R18 R37 R38 R39 R40 R42: library part RG1608P-562-D-T5, "RES SMD 5.6K OHM 0.5% 1/10W 0603", Device Package="0603 (1608 Metric)", Manufacturer=Susumu, Operating Temperature="-55°C ~ 155°C", Power (Watts)="0.1W, 1/10W", Ratings=AEC-Q200, Supplier Device Package=0603, Supplier Part Number 1=408-RG1608P-562-D-T5CT-ND, Temperature Coefficient=±25ppm/°C, Tolerance=±0.5%, ComponentLink1Description=Datasheet, ComponentLink1URL=https://www.susumu.co.jp/common/pdf/n_catalog_partition01_en.pdf, ComponentLink2Description="DigiKey Link", ComponentLink2URL=https://www.digikey.com/en/products/detail/susumu/RG1608P-562-D-T5/1262267, Composition="Thin Film", Features="Anti-Sulfur, Automotive AEC-Q200", Height - Seated (Max)="0.020\" (0.50mm)", LastUpdated="2/9/2024 8:40:32 PM", Lifecycle Status=Active, Minimum Order=1, Number of Terminations=2, Package / Case="0603 (1608 Metric)", Packaging=TapeAndReel, Part Number=RG1608P-562-D-T5, PartId=82077, Price=0.02, Resistance="5.6 kOhms", Series=RG, Size / Dimension="0.063\" L x 0.031\" W (1.60mm x 0.80mm)", Supplier 1=DigiKey
R1_1 R1_XLR1 R1_XLR2 R1_XLR3 R1_XLR4 R2_1 R2_XLR1 R2_XLR2 R2_XLR3 R2_XLR4 R3_1 R4_1 R7_XLR1 R7_XLR2 R7_XLR3 R7_XLR4 R9_XLR1 R9_XLR2 R9_XLR3 R9_XLR4 R16_XLR1 R16_XLR2 R16_XLR3 R16_XLR4 R18_XLR1 R18_XLR2 R18_XLR3 R18_XLR4 R63_XLR1 R63_XLR2 R63_XLR3 R63_XLR4 R66_XLR1 R66_XLR2 R66_XLR3 R66_XLR4: library part AC0603FR-07510RL, "RES SMD 510 OHM 1% 1/10W 0603", Device Package="0603 (1608 Metric)", Manufacturer=Yageo, Operating Temperature="-55°C ~ 155°C", Power (Watts)="0.1W, 1/10W", Ratings=AEC-Q200, Supplier Device Package=0603, Supplier Part Number 1=YAG3615CT-ND, Temperature Coefficient=±100ppm/°C, Tolerance=±1%, ComponentLink1Description=Datasheet, ComponentLink1URL=https://www.yageo.com/upload/media/product/productsearch/datasheet/rchip/PYu-AC_51_RoHS_L_7.pdf, ComponentLink2Description="DigiKey Link", ComponentLink2URL=https://www.digikey.com/en/products/detail/yageo/AC0603FR-07510RL/5896175, Composition="Thick Film", Features="Automotive AEC-Q200, Moisture Resistant", Height - Seated (Max)="0.022\" (0.55mm)", Lifecycle Status=Active, Minimum Order=1, Number of Terminations=2, Package / Case="0603 (1608 Metric)", Packaging=CutTape, Part Number=AC0603FR-07510RL, Part Status=Active, PartId=15979, Price=0.01, Resistance="510 Ohms", Series=AC, Size / Dimension="0.063\" L x 0.031\" W (1.60mm x 0.80mm)", Supplier 1=DigiKey
  R1_1 R2_1 R3_1 R4_1: LastUpdated="7/25/2024 9:19:25 AM"
  R1_XLR1 R1_XLR2 R1_XLR3 R1_XLR4 R2_XLR1 R2_XLR2 R2_XLR3 R2_XLR4 R7_XLR1 R7_XLR2 R7_XLR3 R7_XLR4 R9_XLR1 R9_XLR2 R9_XLR3 R9_XLR4 R16_XLR1 R16_XLR2 R16_XLR3 R16_XLR4 R18_XLR1 R18_XLR2 R18_XLR3 R18_XLR4 R63_XLR1 R63_XLR2 R63_XLR3 R63_XLR4 R66_XLR1 R66_XLR2 R66_XLR3 R66_XLR4: LastUpdated="4/6/2026 7:43:51 PM"
R3_XLR1 R3_XLR2 R3_XLR3 R3_XLR4 R6_XLR1 R6_XLR2 R6_XLR3 R6_XLR4 R10_XLR1 R10_XLR2 R10_XLR3 R10_XLR4 R13_XLR1 R13_XLR2 R13_XLR3 R13_XLR4 R14_XLR1 R14_XLR2 R14_XLR3 R14_XLR4 R15_XLR1 R15_XLR2 R15_XLR3 R15_XLR4 R20_XLR1 R20_XLR2 R20_XLR3 R20_XLR4 R64_XLR1 R64_XLR2 R64_XLR3 R64_XLR4 R65_XLR1 R65_XLR2 R65_XLR3 R65_XLR4: library part AC0603FR-075K1L, "RES SMD 5.1K OHM 1% 1/10W 0603", Device Package="0603 (1608 Metric)", Manufacturer=Yageo, Operating Temperature="-55°C ~ 155°C", Power (Watts)="0.1W, 1/10W", Ratings=AEC-Q200, Supplier Device Package=0603, Supplier Part Number 1=YAG3621CT-ND, Temperature Coefficient=±100ppm/°C, Tolerance=±1%, ComponentLink1Description=Datasheet, ComponentLink1URL=https://www.yageo.com/upload/media/product/productsearch/datasheet/rchip/PYu-AC_51_RoHS_L_7.pdf, ComponentLink2Description="DigiKey Link", ComponentLink2URL=https://www.digikey.com/en/products/detail/yageo/AC0603FR-075K1L/5896209, Composition="Thick Film", Features="Automotive AEC-Q200, Moisture Resistant", Height - Seated (Max)="0.022\" (0.55mm)", LastUpdated="4/6/2026 7:43:48 PM", Lifecycle Status=Active, Minimum Order=1, Number of Terminations=2, Package / Case="0603 (1608 Metric)", Packaging=CutTape, Part Number=AC0603FR-075K1L, Part Status=Active, PartId=17442, Price=0.01, Resistance="5.1 kOhms", Series=AC, Size / Dimension="0.063\" L x 0.031\" W (1.60mm x 0.80mm)", Supplier 1=DigiKey
R4_XLR1 R4_XLR2 R4_XLR3 R4_XLR4: library part ERJ-3EKF1004V, "RES SMD 1M OHM 1% 1/10W 0603", Device Package="0603 (1608 Metric)", Manufacturer="Panasonic Electronic Components", Operating Temperature="-55°C ~ 155°C", Power (Watts)="0.1W, 1/10W", Ratings=AEC-Q200, Supplier Device Package=0603, Supplier Part Number 1=P1.00MHCT-ND, Temperature Coefficient=±100ppm/°C, Tolerance=±1%, ComponentLink1Description=Datasheet, ComponentLink1URL=https://industrial.panasonic.com/cdbs/www-data/pdf/RDA0000/AOA0000C304.pdf, ComponentLink2Description="DigiKey Link", ComponentLink2URL=https://www.digikey.com/en/products/detail/panasonic-electronic-components/ERJ-3EKF1004V/196033, Composition="Thick Film", Features="Automotive AEC-Q200", Height - Seated (Max)="0.022\" (0.55mm)", LastUpdated="2/9/2024 8:42:00 PM", Lifecycle Status=Active, Minimum Order=1, Number of Terminations=2, Package / Case="0603 (1608 Metric)", Packaging=TapeAndReel, Part Number=ERJ-3EKF1004V, Part Status=Active, PartId=25691, Price=0.01, Resistance="1 MOhms", Series=ERJ-3EK, Size / Dimension="0.063\" L x 0.031\" W (1.60mm x 0.80mm)", Supplier 1=DigiKey
R5_XLR1 R5_XLR2 R5_XLR3 R5_XLR4: library part AC0603FR-07150KL, "RES SMD 150K OHM 1% 1/10W 0603", Device Package="0603 (1608 Metric)", Manufacturer=Yageo, Operating Temperature="-55°C ~ 155°C", Power (Watts)="0.1W, 1/10W", Ratings=AEC-Q200, Supplier Device Package=0603, Supplier Part Number 1=YAG3567CT-ND, Temperature Coefficient=±100ppm/°C, Tolerance=±1%, ComponentLink1Description=Datasheet, ComponentLink1URL=https://www.yageo.com/upload/media/product/productsearch/datasheet/rchip/PYu-AC_51_RoHS_L_7.pdf, ComponentLink2Description="DigiKey Link", ComponentLink2URL=https://www.digikey.com/en/products/detail/yageo/AC0603FR-07150KL/5895795, Composition="Thick Film", Features="Automotive AEC-Q200, Moisture Resistant", Height - Seated (Max)="0.022\" (0.55mm)", LastUpdated="4/6/2026 7:43:48 PM", Lifecycle Status=Active, Minimum Order=1, Number of Terminations=2, Package / Case="0603 (1608 Metric)", Packaging=CutTape, Part Number=AC0603FR-07150KL, Part Status=Active, PartId=17374, Price=0.01, Resistance="150 kOhms", Series=AC, Size / Dimension="0.063\" L x 0.031\" W (1.60mm x 0.80mm)", Supplier 1=DigiKey
R8_XLR1 R8_XLR2 R8_XLR3 R8_XLR4 R11_XLR1 R11_XLR2 R11_XLR3 R11_XLR4 R17_XLR1 R17_XLR2 R17_XLR3 R17_XLR4 R19_XLR1 R19_XLR2 R19_XLR3 R19_XLR4 R52 R58: library part AC0603FR-0751KL, "RES SMD 51K OHM 1% 1/10W 0603", Device Package="0603 (1608 Metric)", Manufacturer=Yageo, Operating Temperature="-55°C ~ 155°C", Power (Watts)="0.1W, 1/10W", Ratings=AEC-Q200, Supplier Device Package=0603, Supplier Part Number 1=YAG3616CT-ND, Temperature Coefficient=±100ppm/°C, Tolerance=±1%, ComponentLink1Description=Datasheet, ComponentLink1URL=https://www.yageo.com/upload/media/product/productsearch/datasheet/rchip/PYu-AC_51_RoHS_L_7.pdf, ComponentLink2Description="DigiKey Link", ComponentLink2URL=https://www.digikey.com/en/products/detail/yageo/AC0603FR-0751KL/5896179, Composition="Thick Film", Features="Automotive AEC-Q200, Moisture Resistant", Height - Seated (Max)="0.022\" (0.55mm)", LastUpdated="4/6/2026 7:43:48 PM", Lifecycle Status=Active, Minimum Order=1, Number of Terminations=2, Package / Case="0603 (1608 Metric)", Packaging=CutTape, Part Number=AC0603FR-0751KL, Part Status=Active, PartId=17419, Price=0.01, Resistance="51 kOhms", Series=AC, Size / Dimension="0.063\" L x 0.031\" W (1.60mm x 0.80mm)", Supplier 1=DigiKey
R10 R14 R19 R20 R21 R22 R23 R24 R25 R26 R27 R28 R29 R30 R31 R32 R33 R34 R35 R36: library part RC0402JR-0722RL, "RES 22 OHM 5% 1/16W 0402", Device Package="0402 (1005 Metric)", Manufacturer=Yageo, Operating Temperature="-55°C ~ 155°C", Power (Watts)="0.063W, 1/16W", Supplier Device Package=0402, Supplier Part Number 1=311-22JRCT-ND, Temperature Coefficient=±100ppm/°C, Tolerance=±5%, ComponentLink1Description=Datasheet, ComponentLink1URL=https://www.yageo.com/upload/media/product/productsearch/datasheet/rchip/PYu-RC_Group_51_RoHS_L_10.pdf, ComponentLink2Description="DigiKey Link", ComponentLink2URL=https://www.digikey.com/en/products/detail/yageo/RC0402JR-0722RL/726444, Composition="Thick Film", Features="Moisture Resistant", Height - Seated (Max)="0.016\" (0.40mm)", LastUpdated="4/6/2026 7:41:13 PM", Lifecycle Status=Active, Minimum Order=1, Number of Terminations=2, Package / Case="0402 (1005 Metric)", Packaging=CutTape, Part Number=RC0402JR-0722RL, Part Status=Active, PartId=7724, Price=0.01, Resistance="22 Ohms", Series=RC_L, Size / Dimension="0.039\" L x 0.020\" W (1.00mm x 0.50mm)", Supplier 1=DigiKey
R11 R12 R41: "RES ARRAY 4 RES 33 OHM 1206", Manufacturer="Bourns Inc.", Number of Resistors=4, Operating Temperature="-55°C ~ 125°C", Package / Case="1206 (3216 Metric), Convex, Long Side Terminals", Power Per Element=62.5mW, Resistance (Ohms)=33, Supplier Device Package=1206, Supplier Part Number 1=CAY16-33R0F4LFCT-ND, Temperature Coefficient=±200ppm/°C, Tolerance=±1%, Circuit Type=Isolated, ComponentLink1Description=Datasheet, ComponentLink1URL=https://www.bourns.com/docs/Product-Datasheets/CATCAY.pdf, ComponentLink2Description="DigiKey Link", ComponentLink2URL=http://digikey.com/product-detail/en/bourns-inc/CAY16-33R0F4LF/CAY16-33R0F4LFCT-ND/5774985, Height - Seated (Max)="0.024\" (0.60mm)", LastUpdated="9/2/2020 1:23:24 AM", Lifecycle Status=Active, Minimum Order=1, Mounting Type="Surface Mount", Number of Pins=8, Packaging=TapeAndReel, Part Number=CAY16-33R0F4LF, Part Status=Active, PartId=129, Price=0.01, Series=CAY16, Size / Dimension="0.126\" L x 0.063\" W (3.20mm x 1.60mm)", Supplier 1=DigiKey
R15 R16: library part RCA0402100RFKED, "RES SMD 100 OHM 1% 1/16W 0402", Device Package="0402 (1005 Metric)", Manufacturer="Vishay Dale", Operating Temperature="-55°C ~ 155°C", Power (Watts)="0.063W, 1/16W", Ratings=AEC-Q200, Supplier Device Package=0402, Supplier Part Number 1=541-2177-1-ND, Temperature Coefficient=±100ppm/°C, Tolerance=±1%, ComponentLink1Description=Datasheet, ComponentLink1URL=http://www.vishay.com/docs/20037/rcae3.pdf, ComponentLink2Description="DigiKey Link", ComponentLink2URL=https://www.digikey.com/en/products/detail/vishay-dale/RCA0402100RFKED/4946746, Composition="Thick Film", Features="Anti-Sulfur, Automotive AEC-Q200", Height - Seated (Max)="0.016\" (0.40mm)", LastUpdated="2/9/2024 8:30:21 PM", Lifecycle Status=Active, Minimum Order=1, Number of Terminations=2, Package / Case="0402 (1005 Metric)", Packaging=TapeAndReel, Part Number=RCA0402100RFKED, Part Status=Active, PartId=3179, Price=0.01, Resistance="100 Ohms", Series=RCA, Size / Dimension="0.039\" L x 0.020\" W (1.00mm x 0.50mm)", Supplier 1=DigiKey
R43 R44 R106 R107 R109: library part ERJ-3EKF1002V, "RES SMD 10K OHM 1% 1/10W 0603", Device Package="0603 (1608 Metric)", Manufacturer="Panasonic Electronic Components", Operating Temperature="-55°C ~ 155°C", Power (Watts)="0.1W, 1/10W", Ratings=AEC-Q200, Supplier Device Package=0603, Supplier Part Number 1=P10.0KHCT-ND, Temperature Coefficient=±100ppm/°C, Tolerance=±1%, ComponentLink1Description=Datasheet, ComponentLink1URL=https://industrial.panasonic.com/cdbs/www-data/pdf/RDA0000/AOA0000C304.pdf, ComponentLink2Description="DigiKey Link", ComponentLink2URL=https://www.digikey.com/en/products/detail/panasonic-electronic-components/ERJ-3EKF1002V/196066, Composition="Thick Film", Features="Automotive AEC-Q200", Height - Seated (Max)="0.022\" (0.55mm)", LastUpdated="2/9/2024 8:41:59 PM", Lifecycle Status=Active, Minimum Order=1, Number of Terminations=2, Package / Case="0603 (1608 Metric)", Packaging=TapeAndReel, Part Number=ERJ-3EKF1002V, Part Status=Active, PartId=25695, Price=0.01, Resistance="10 kOhms", Series=ERJ-3EK, Size / Dimension="0.063\" L x 0.031\" W (1.60mm x 0.80mm)", Supplier 1=DigiKey
R45: library part AC0603FR-0736KL, "RES SMD 36K OHM 1% 1/10W 0603", Device Package="0603 (1608 Metric)", Manufacturer=Yageo, Operating Temperature="-55°C ~ 155°C", Power (Watts)="0.1W, 1/10W", Ratings=AEC-Q200, Supplier Device Package=0603, Supplier Part Number 1=13-AC0603FR-0736KLCT-ND, Temperature Coefficient=±100ppm/°C, Tolerance=±1%, ComponentLink1Description=Datasheet, ComponentLink1URL=https://www.yageo.com/upload/media/product/productsearch/datasheet/rchip/PYu-AC_51_RoHS_L_8.pdf, ComponentLink2Description="DigiKey Link", ComponentLink2URL=https://www.digikey.com/en/products/detail/yageo/AC0603FR-0736KL/5896061, Composition="Thick Film", Features="Automotive AEC-Q200, Moisture Resistant", Height - Seated (Max)="0.022\" (0.55mm)", LastUpdated="4/6/2026 7:43:28 PM", Lifecycle Status=Active, Minimum Order=1, Number of Terminations=2, Package / Case="0603 (1608 Metric)", Packaging=TapeAndReel, Part Number=AC0603FR-0736KL, Part Status=Active, PartId=67632, Price=0.01, Resistance="36 kOhms", Series=AC, Size / Dimension="0.063\" L x 0.031\" W (1.60mm x 0.80mm)", Supplier 1=DigiKey
R46 R47 R51 R57 R60 R61 R62: library part RCA06031K00FKEA, "RES SMD 1K OHM 1% 1/10W 0603", Device Package="0603 (1608 Metric)", Manufacturer="Vishay Dale", Operating Temperature="-55°C ~ 155°C", Power (Watts)="0.1W, 1/10W", Ratings=AEC-Q200, Supplier Device Package=0603, Supplier Part Number 1=541-2199-1-ND, Temperature Coefficient=±100ppm/°C, Tolerance=±1%, ComponentLink1Description=Datasheet, ComponentLink1URL=http://www.vishay.com/docs/20037/rcae3.pdf, ComponentLink2Description="DigiKey Link", ComponentLink2URL=https://www.digikey.com/en/products/detail/vishay-dale/RCA06031K00FKEA/4946768, Composition="Thick Film", Features="Anti-Sulfur, Automotive AEC-Q200", Height - Seated (Max)="0.020\" (0.50mm)", LastUpdated="2/9/2024 8:43:33 PM", Lifecycle Status=Active, Minimum Order=1, Number of Terminations=2, Package / Case="0603 (1608 Metric)", Packaging=TapeAndReel, Part Number=RCA06031K00FKEA, Part Status=Active, PartId=5741, Price=0.01, Resistance="1 kOhms", Series=RCA, Size / Dimension="0.061\" L x 0.033\" W (1.55mm x 0.85mm)", Supplier 1=DigiKey
R48 R54: library part AC0603FR-076K81L, "RES SMD 6.81K OHM 1% 1/10W 0603", Device Package="0603 (1608 Metric)", Manufacturer=Yageo, Operating Temperature="-55°C ~ 155°C", Power (Watts)="0.1W, 1/10W", Ratings=AEC-Q200, Supplier Device Package=0603, Supplier Part Number 1=YAG3626CT-ND, Temperature Coefficient=±100ppm/°C, Tolerance=±1%, ComponentLink1Description=Datasheet, ComponentLink1URL=https://www.yageo.com/upload/media/product/productsearch/datasheet/rchip/PYu-AC_51_RoHS_L_7.pdf, ComponentLink2Description="DigiKey Link", ComponentLink2URL=https://www.digikey.com/en/products/detail/yageo/AC0603FR-076K81L/5896265, Composition="Thick Film", Features="Automotive AEC-Q200, Moisture Resistant", Height - Seated (Max)="0.022\" (0.55mm)", LastUpdated="4/6/2026 7:43:54 PM", Lifecycle Status=Active, Minimum Order=1, Number of Terminations=2, Package / Case="0603 (1608 Metric)", Packaging=TapeAndReel, Part Number=AC0603FR-076K81L, Part Status=Active, PartId=11704, Price=0.01, Resistance="6.81 kOhms", Series=AC, Size / Dimension="0.063\" L x 0.031\" W (1.60mm x 0.80mm)", Supplier 1=DigiKey
R49 R55: library part AC0603FR-071K47L, "RES SMD 1.47K OHM 1% 1/10W 0603", Device Package="0603 (1608 Metric)", Manufacturer=Yageo, Operating Temperature="-55°C ~ 155°C", Power (Watts)="0.1W, 1/10W", Ratings=AEC-Q200, Supplier Device Package=0603, Supplier Part Number 1=13-AC0603FR-071K47LCT-ND, Temperature Coefficient=±100ppm/°C, Tolerance=±1%, ComponentLink1Description=Datasheet, ComponentLink1URL=https://www.yageo.com/upload/media/product/productsearch/datasheet/rchip/PYu-AC_51_RoHS_L_8.pdf, ComponentLink2Description="DigiKey Link", ComponentLink2URL=https://www.digikey.com/en/products/detail/yageo/AC0603FR-071K47L/5895863, Composition="Thick Film", Features="Automotive AEC-Q200, Moisture Resistant", Height - Seated (Max)="0.022\" (0.55mm)", LastUpdated="4/6/2026 7:43:31 PM", Lifecycle Status=Active, Minimum Order=1, Number of Terminations=2, Package / Case="0603 (1608 Metric)", Packaging=CutTape, Part Number=AC0603FR-071K47L, Part Status=Active, PartId=65725, Price=0.01, Resistance="1.47 kOhms", Series=AC, Size / Dimension="0.063\" L x 0.031\" W (1.60mm x 0.80mm)", Supplier 1=DigiKey
R50 R56: library part AC0603FR-07221RL, "RES SMD 221 OHM 1% 1/10W 0603", Device Package="0603 (1608 Metric)", Manufacturer=Yageo, Operating Temperature="-55°C ~ 155°C", Power (Watts)="0.1W, 1/10W", Ratings=AEC-Q200, Supplier Device Package=0603, Supplier Part Number 1=13-AC0603FR-07221RLCT-ND, Temperature Coefficient=±100ppm/°C, Tolerance=±1%, ComponentLink1Description=Datasheet, ComponentLink1URL=https://www.yageo.com/upload/media/product/productsearch/datasheet/rchip/PYu-AC_51_RoHS_L_10.pdf, ComponentLink2Description="DigiKey Link", ComponentLink2URL=https://www.digikey.com/en/products/detail/yageo/AC0603FR-07221RL/5895921, Composition="Thick Film", Features="Automotive AEC-Q200, Moisture Resistant", Height - Seated (Max)="0.022\" (0.55mm)", LastUpdated="4/6/2026 7:43:16 PM", Lifecycle Status=Active, Minimum Order=1, Number of Terminations=2, Package / Case="0603 (1608 Metric)", Packaging=CutTape, Part Number=AC0603FR-07221RL, PartId=87217, Price=0.01, Resistance="221 Ohms", Series=AC, Size / Dimension="0.063\" L x 0.031\" W (1.60mm x 0.80mm)", Supplier 1=DigiKey
R53 R59: library part AC0603FR-07191RL, "RES SMD 191 OHM 1% 1/10W 0603", Device Package="0603 (1608 Metric)", Manufacturer=Yageo, Operating Temperature="-55°C ~ 155°C", Power (Watts)="0.1W, 1/10W", Ratings=AEC-Q200, Supplier Device Package=0603, Supplier Part Number 1=13-AC0603FR-07191RLCT-ND, Temperature Coefficient=±100ppm/°C, Tolerance=±1%, ComponentLink1Description=Datasheet, ComponentLink1URL=https://www.yageo.com/upload/media/product/productsearch/datasheet/rchip/PYu-AC_51_RoHS_L_9.pdf, ComponentLink2Description="DigiKey Link", ComponentLink2URL=https://www.digikey.com/en/products/detail/yageo/AC0603FR-07191RL/5895841, Composition="Thick Film", Features="Automotive AEC-Q200, Moisture Resistant", Height - Seated (Max)="0.022\" (0.55mm)", LastUpdated="4/6/2026 7:43:26 PM", Lifecycle Status=Active, Minimum Order=1, Number of Terminations=2, Package / Case="0603 (1608 Metric)", Packaging=TapeAndReel, Part Number=AC0603FR-07191RL, Part Status=Active, PartId=72108, Price=0.01, Resistance="191 Ohms", Series=AC, Size / Dimension="0.063\" L x 0.031\" W (1.60mm x 0.80mm)", Supplier 1=DigiKey
TP1: library part TestPoint
U1 U2 U3: "Stero in/ot audio codec"
U6 U7: "1-ch, 2-input 1.65-V to 5.5-V 32 mA drive strength AND gate", Package="SOT-23-5 Texas Instruments", Check_prices=https://www.snapeda.com/parts/SN74LVC1G08DBVR/Texas+Instruments/view-part/?ref=eda, MF="Texas Instruments", MP=SN74LVC1G08DBVR, SnapEDA_Link=https://www.snapeda.com/parts/SN74LVC1G08DBVR/Texas+Instruments/view-part/?ref=snap
X1 X2 X3 X4 X5 X6 X7 X8: library part PBD-20, CurrentMax=3A, Manufacturer=Connfly, VoltageMax=500VAC, CommentText="\"Разъем\"", HelpURL=https://www.chipdip.ru/product/pbd-20, Multichannel=20pin, PartNumber=PBD-20, Pitch=2.54mm, TypeConnector=Connector, ValueManufacturerPartNumber="Connector, 20pin, 2.54mm, 500VAC, 3A"